# Altium PCB 175-00002 rev 4, PCB, Sinistro Clock Gen.PcbDoc (part 2 of 6)
Units mil, origin at the board's own origin, x right, y up, seen from the top; angles counter-clockwise.
Board outline 5905.51 x 4330.71 mil, 10 copper layers (Top Layer (.GTL), MidLayer1 (*.G1), +12V (*.GP1), -12V (*.GP2), A & GND (*.GP3), Chassis E (*.GP4), +28V & VCC (*.GP5), MidLayer2 (*.G2), MidLayer3 (*.G3), Bottom Layer (.GBL)), stack 64.6 mil thick; 505 components, 332 nets, 1954 pads, 918 vias.
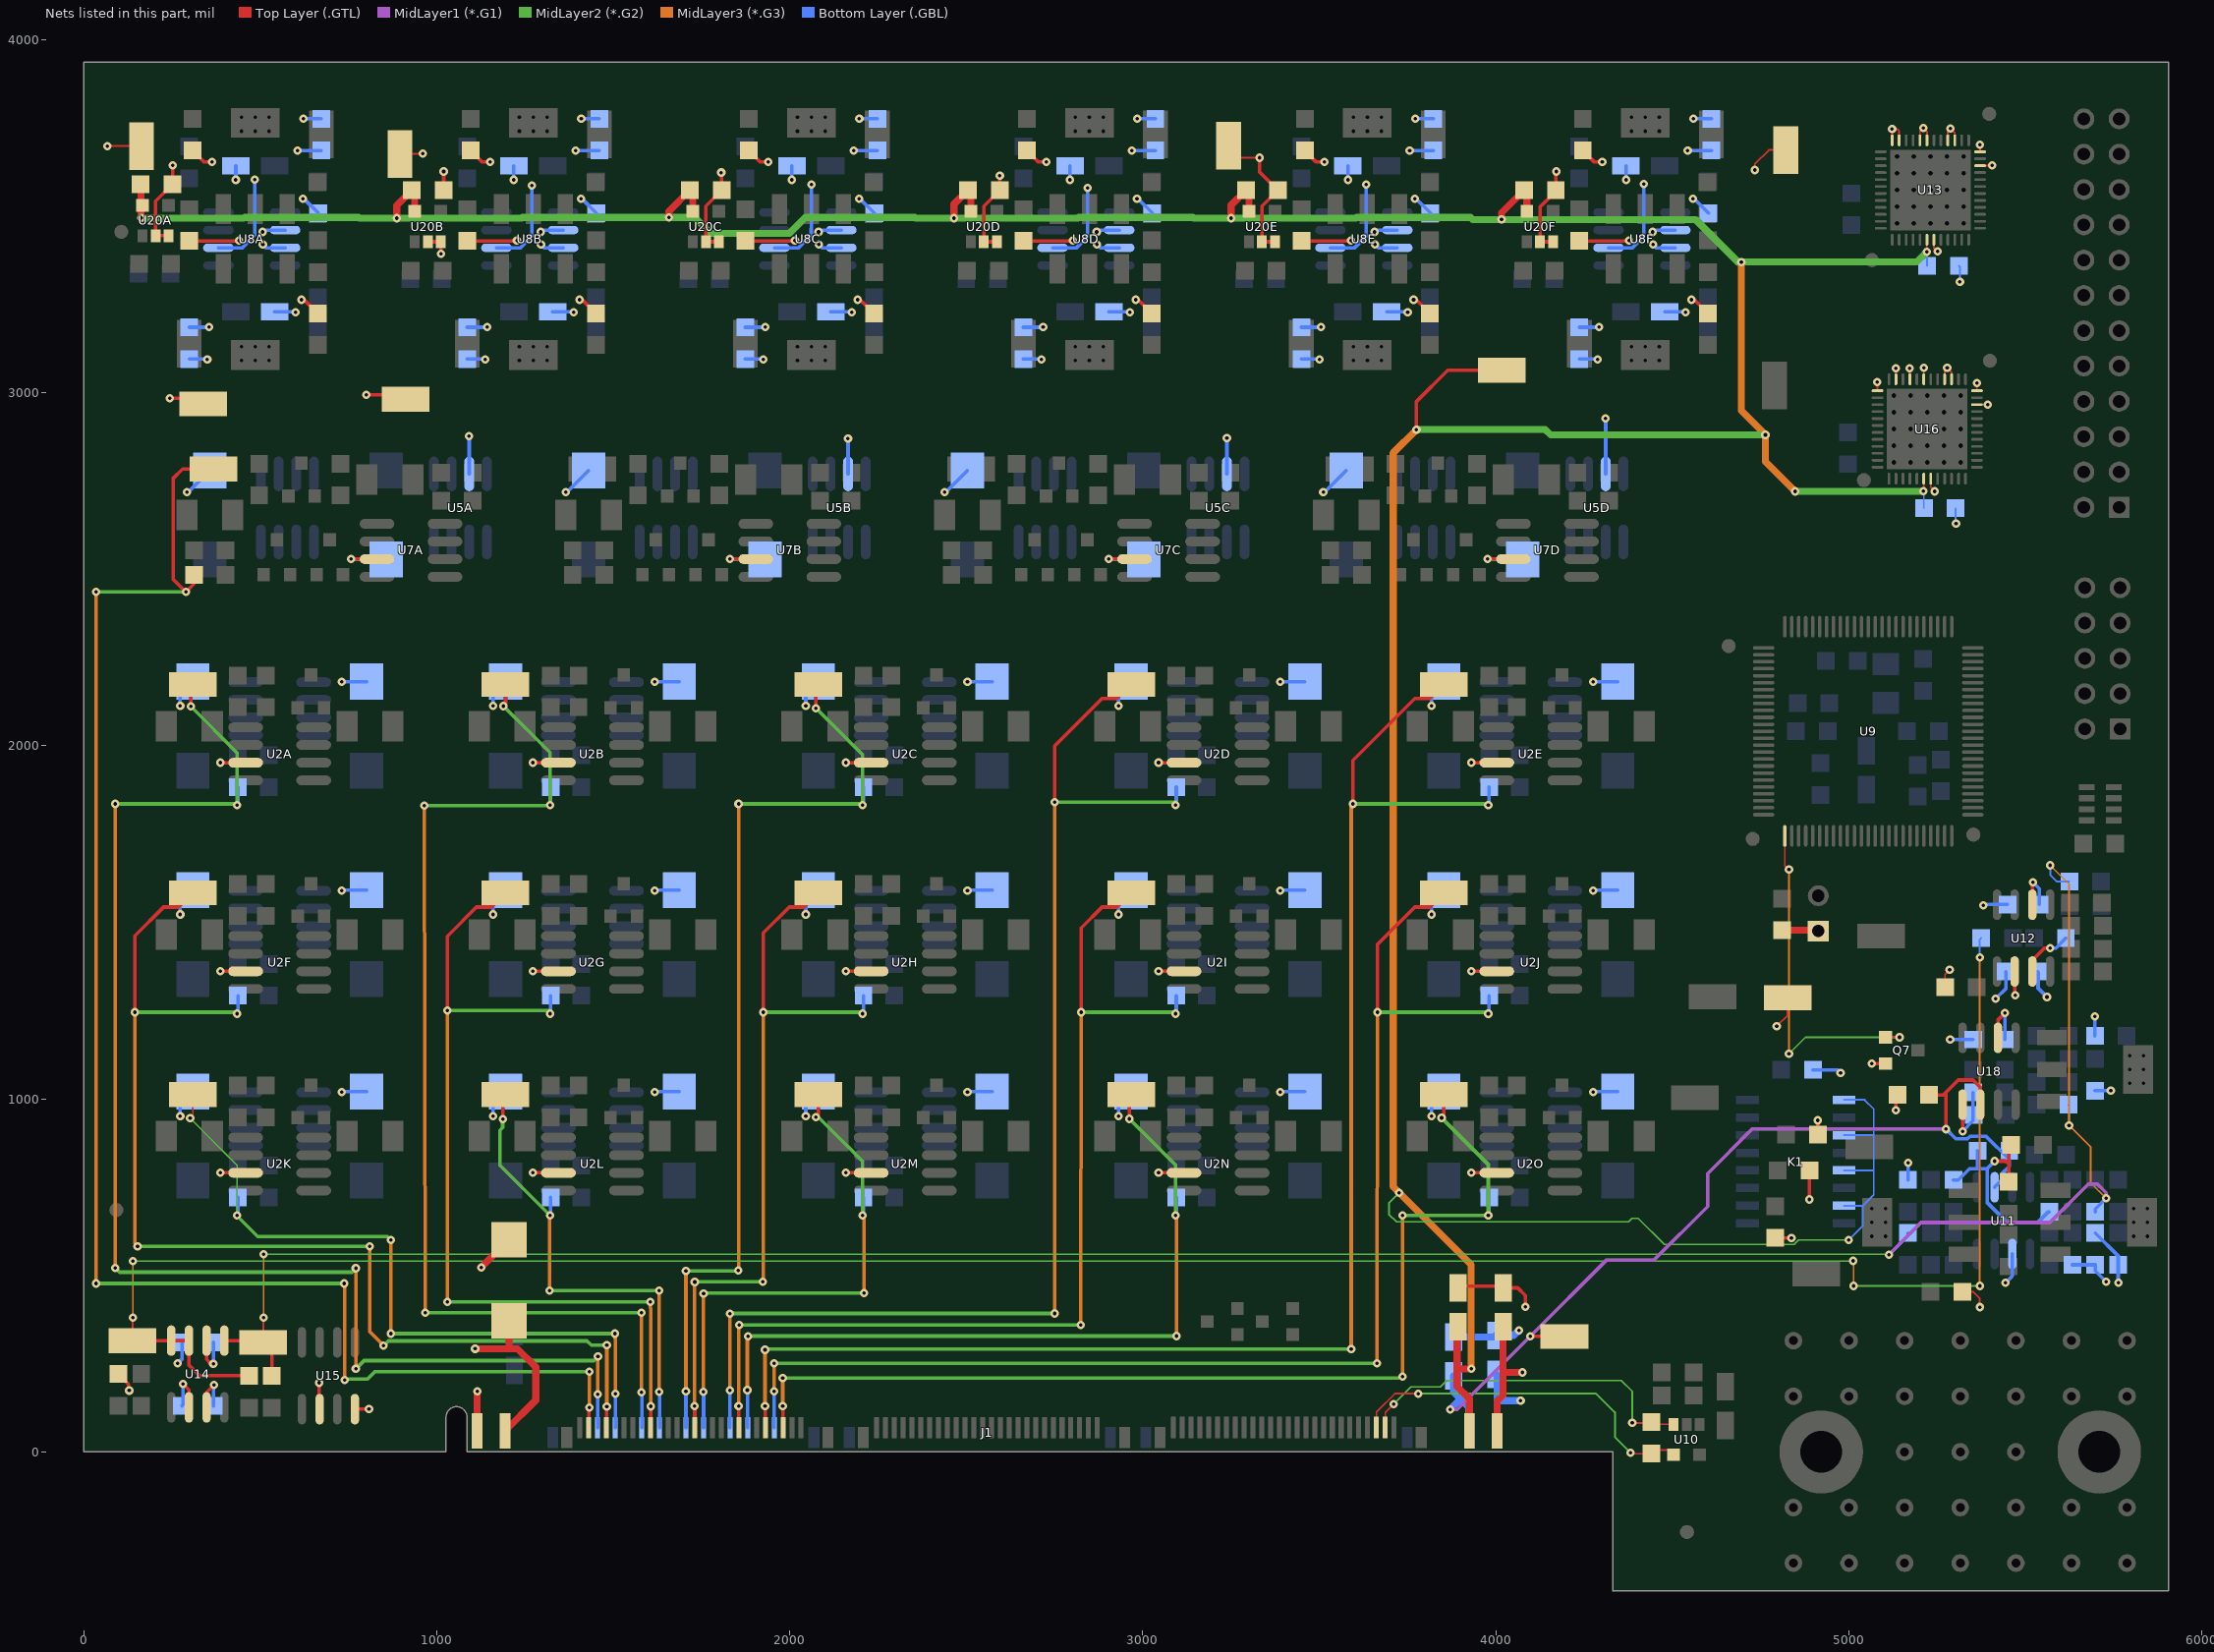
[diagram p10: the nets of this part, all layers, seen from the top]

## Footprints (in the part's own frame and the unit in brackets; to place one, negate y for a bottom-side part, rotate by r counter-clockwise, add the part's x,y. Pads: shape width x height; smd on the part's side, far side on the other; paste and mask are expansions set on the pad) (continued)
182H_N [mm] "8-Pin Small Outline Integrated Circuit 1.27 mm Pitch, IPC Medium Density"
  oval 2.2x0.6 smd: 1(-2.4,1.905) 2(-2.4,0.635) 3(-2.4,-0.635) 4(-2.4,-1.905) 5(2.4,-1.905) 6(2.4,-0.635) 7(2.4,0.635) 8(2.4,1.905)
  silkscreen extent -2.52,-2.5 0.9,2.88, body extent -1.95,-2.45 1.95,2.45, height 1.75
HDR1X2 [mm] "Connector; Header; 2 Position"
  rect 1.5x1.5 hole 0.9: 1(0,0)
  round 1.5 hole 0.9: 2(2.54,0)
  silkscreen extent -1.27,-1.27 3.81,1.27
HDR2X5 [mm] "Connector; Header; 5x2 Position"
  rect 1.5x1.5 hole 0.9: 1(0,0)
  round 1.5 hole 0.9: 2(0,2.54) 3(2.54,0) 4(2.54,2.54) 5(5.08,0) 6(5.08,2.54) 7(7.62,0) 8(7.62,2.54) 9(10.16,0) 10(10.16,2.54)
  silkscreen extent -1.27,-1.27 11.43,3.81
HDR2X12 [mm] "Connector; Header; 12x2 Position"
  rect 1.5x1.5 hole 0.9: 1(0,0)
  round 1.5 hole 0.9: 2(0,2.54) 3(2.54,0) 4(2.54,2.54) 5(5.08,0) 6(5.08,2.54) 7(7.62,0) 8(7.62,2.54) 9(10.16,0) 10(10.16,2.54) 11(12.7,0) 12(12.7,2.54) 13(15.24,0) 14(15.24,2.54) 15(17.78,0) 16(17.78,2.54) 17(20.32,0) 18(20.32,2.54) 19(22.86,0) 20(22.86,2.54) 21(25.4,0) 22(25.4,2.54) 23(27.94,0) 24(27.94,2.54)
  silkscreen extent -1.27,-1.27 29.21,3.81
QFN48_M [mm] "QFN, 48-Leads, Body 7x7mm, Pitch 0.5mm, IPC Low Density"
  round 0.66 hole 0.33 mask+0: 0(0,0)
  round 0.66 hole 0.33: 0(0,1.2) 0(0,3.6) 0(0,4.8) 0(1.2,0) 0(1.2,1.2) 0(1.2,2.4) 0(1.2,4.8) 0(2.4,0) 0(2.4,1.2) 0(2.4,2.4) 0(2.4,3.6) 0(2.4,4.8) 0(3.6,0) 0(3.6,1.2) 0(3.6,2.4) 0(3.6,3.6) 0(3.6,4.8) 0(4.8,0) 0(4.8,1.2) 0(4.8,2.4) 0(4.8,3.6) 0(4.8,4.8)
  round 0.66 hole 0.33 paste+0 mask+0: 0(0,2.4) 0(1.2,3.6)
  rect 5.8x5.8 smd: 0(2.4,2.4)
  oval 0.85x0.2 smd: 1(-1.175,5.15) 2(-1.175,4.65) 3(-1.175,4.15) 4(-1.175,3.65) 5(-1.175,3.15) 6(-1.175,2.65) 7(-1.175,2.15) 8(-1.175,1.65) 9(-1.175,1.15) 10(-1.175,0.65) 11(-1.175,0.15) 12(-1.175,-0.35) 25(5.975,-0.35) 26(5.975,0.15) 27(5.975,0.65) 28(5.975,1.15) 29(5.975,1.65) 30(5.975,2.15) 31(5.975,2.65) 32(5.975,3.15) 33(5.975,3.65) 34(5.975,4.15) 35(5.975,4.65) 36(5.975,5.15)
  oval 0.2x0.85 smd: 13(-0.35,-1.175) 14(0.15,-1.175) 15(0.65,-1.175) 16(1.15,-1.175) 17(1.65,-1.175) 18(2.15,-1.175) 19(2.65,-1.175) 20(3.15,-1.175) 21(3.65,-1.175) 22(4.15,-1.175) 23(4.65,-1.175) 24(5.15,-1.175) 37(5.15,5.975) 38(4.65,5.975) 39(4.15,5.975) 40(3.65,5.975) 41(3.15,5.975) 42(2.65,5.975) 43(2.15,5.975) 44(1.65,5.975) 45(1.15,5.975) 46(0.65,5.975) 47(0.15,5.975) 48(-0.35,5.975)
  silkscreen extent -2.27,-1.2 6,6, body extent -1.17,-1.18 5.97,5.97, height 0.9
"QMS EDGE PWR PINS" [mil] "78 pos (156 pin) + 8 pwr pins"
  rect 60x14 smd mask+0: 0(69.15,-552.45) 1(69.15,-1152.45) 3(69.15,-1127.45) 5(69.15,-1102.45) 7(69.15,-1077.45) 9(69.15,-1052.45) 11(69.15,-1027.45) 13(69.15,-1002.45) 15(69.15,-977.45) 17(69.15,-952.45) 19(69.15,-927.45) 21(69.15,-902.45) 23(69.15,-877.45) 25(69.15,-852.45) 27(69.15,-827.45) 29(69.15,-802.45) 31(69.15,-777.45) 33(69.15,-752.45) 35(69.15,-727.45) 37(69.15,-702.45) 39(69.15,-677.45) 41(69.15,-652.45) 43(69.15,-627.45) 45(69.15,-602.45) 47(69.15,-577.45) 51(69.15,-527.45) 53(68.09,-312.11) 55(68.09,-287.11) 57(68.09,-262.11) 59(68.09,-237.11) 61(68.09,-212.11) 63(68.09,-187.11) 65(68.09,-162.11) 67(68.09,-137.11) 69(68.09,-112.11) 71(68.09,-87.11) 73(68.09,-62.11) 75(68.09,-37.11) 77(68.09,-12.11) 79(68.09,12.89) 81(68.09,37.89) 83(68.09,62.89) 85(68.09,87.89) 87(68.09,112.89) 89(68.09,137.89) 91(68.09,162.89) 93(68.09,187.89) 95(68.09,212.89) 97(68.09,237.89) 99(68.09,262.89) 101(68.09,287.89) 103(68.09,312.89) 105(68.09,528.05) 107(68.09,553.05) 109(68.09,578.05) 111(68.09,603.05) 113(68.09,628.05) 115(68.09,653.05) 117(68.09,678.05) 119(68.09,703.05) 121(68.09,728.05) 123(68.09,753.05) 125(68.09,778.05) 127(68.09,803.05) 129(68.09,828.05) 131(68.09,853.05) 133(68.09,878.05) 135(68.09,903.05) 137(68.09,928.05) 139(68.09,953.05) 141(68.09,978.05) 143(68.09,1003.05) 145(68.09,1028.05) 147(68.09,1053.05) 149(68.09,1078.05) 151(68.09,1103.05) 153(68.09,1128.05) 155(68.09,1153.05)
  rect 60x14 smd far side mask+0: 2(69.15,-1152.45) 4(69.15,-1127.45) 6(69.15,-1102.45) 8(69.15,-1077.45) 10(69.15,-1052.45) 12(69.15,-1027.45) 14(69.15,-1002.45) 16(69.15,-977.45) 18(69.15,-952.45) 20(69.15,-927.45) 22(69.15,-902.45) 24(69.15,-877.45) 26(69.15,-852.45) 28(69.15,-827.45) 30(69.15,-802.45) 32(69.15,-777.45) 34(69.15,-752.45) 36(69.15,-727.45) 38(69.15,-702.45) 40(69.15,-677.45) 42(69.15,-652.45) 44(69.15,-627.45) 46(69.15,-602.45) 48(69.15,-577.45) 50(69.15,-552.45) 52(69.15,-527.45) 54(68.09,-312.11) 56(68.09,-287.11) 58(68.09,-262.11) 60(68.09,-237.11) 62(68.09,-212.11) 64(68.09,-187.11) 66(68.09,-162.11) 68(68.09,-137.11) 70(68.09,-112.11) 72(68.09,-87.11) 74(68.09,-62.11) 76(68.09,-37.11) 78(68.09,-12.11) 80(68.09,12.89) 82(68.09,37.89) 84(68.09,62.89) 86(68.09,87.89) 88(68.09,112.89) 90(68.09,137.89) 92(68.09,162.89) 94(68.09,187.89) 96(68.09,212.89) 98(68.09,237.89) 100(68.09,262.89) 102(68.09,287.89) 104(68.09,312.89) 106(68.09,528.05) 108(68.09,553.05) 110(68.09,578.05) 112(68.09,603.05) 114(68.09,628.05) 116(68.09,653.05) 118(68.09,678.05) 120(68.09,703.05) 122(68.09,728.05) 124(68.09,753.05) 126(68.09,778.05) 128(68.09,803.05) 130(68.09,828.05) 132(68.09,853.05) 134(68.09,878.05) 136(68.09,903.05) 138(68.09,928.05) 140(68.09,953.05) 142(68.09,978.05) 144(68.09,1003.05) 146(68.09,1028.05) 148(68.09,1053.05) 150(68.09,1078.05) 152(68.09,1103.05) 154(68.09,1128.05) 156(68.09,1153.05)
  rect 60x31 smd mask+0: 157(41.09,-1229.45) 159(41.09,-489.45) 161(41.09,-389.45) 163(41.09,350.55) 165(41.09,450.55) 167(41.09,1190.55)
  rect 60x31 smd far side mask+0: 158(41.09,-1189.45) 160(41.09,-449.45) 162(41.09,-349.45) 164(41.09,390.55) 166(41.09,490.55) 168(41.09,1230.55)
  rect 100x30 smd mask+0: PC01(59.65,-1444.45) PC03(59.65,-1365.55) PC05(59.15,1365.55) PC07(59.15,1444.45)
  rect 100x30 smd far side mask+0: PC02(59.65,-1444.45) PC04(59.65,-1365.55) PC06(59.15,1365.55) PC08(59.15,1444.45)
  silkscreen extent -373,-1649 217,1647
"RES ARRAY 0603 x 4" [mm]
  rect 0.44x1.15 smd: 1(0,0.1) 2(0,2.05) 3(0.8,0.1) 4(0.8,2.05) 5(1.6,0.1) 6(1.6,2.05) 7(2.4,0.1) 8(2.4,2.05)
  silkscreen extent -0.6,-0.6 3,1.8
S8_N [mm] "SOIC, 8-Leads, Body 4.9x3.9mm, Pitch 1.27mm, IPC Medium Density"
  oval 2.2x0.6 smd: 1(-2.4,1.905) 2(-2.4,0.635) 3(-2.4,-0.635) 4(-2.4,-1.905) 5(2.4,-1.905) 6(2.4,-0.635) 7(2.4,0.635) 8(2.4,1.905)
  silkscreen extent -2.53,-2.5 0.9,2.88, body extent -1.95,-2.45 1.95,2.45, height 1.76
SMD_0805 [mil]
  rect 50x50 smd: 1(-45,0) 2(45,0)
  silkscreen extent -1,-1 1,1
SMD_1206 [mil]
  rect 63x75 smd: 1(-55,0) 2(55,0)
SMD_1210_INDUCT [mil]
  rect 60x86 smd: 1(-65,0) 2(65,0)
  silkscreen extent -73,-62 73,62
SMD_CAP_3216 [mil]
  rect 78x48 smd: 1(55,0) 2(-55,0)
  silkscreen extent -108,-65 134,38
SMD_CAP_6032 [mil]
  rect 100x100 smd: NEG(-115,0) POS(115,0)
  silkscreen extent -179,-110 195,64
SMD_CAP_7343 [mil]
  rect 102x94 smd: NEG(-126,0) POS(126,0)
  silkscreen extent -145,-80 220,80
SMD_SOT23_3 [mil]
  rect 36x36 smd: 1(-37,-43) 2(37,-43) 3(0,43)
  silkscreen extent -57,-25 57,25
SMD_SOT23_5 [mil]
  rect 28x36 smd: 1(37,43) 2(0,43) 3(-37,43)
  rect 36x36 smd: 4(-37,-43) 5(37,-43)
  silkscreen extent -57,-25 57,85
"SMD_TEST POINT" [mil] "Keystone 5015"
  rect 135x70 smd: 1(0,0)
SO-16 [mm] "Small Outline; 16 Leads; Body Width 5.6 mm; Pitch 1.27 mm"
  rect 0.6x1.65 smd: 1(-4.445,-3.475) 2(-3.175,-3.475) 3(-1.905,-3.475) 4(-0.635,-3.475) 5(0.635,-3.475) 6(1.905,-3.475) 7(3.175,-3.475) 8(4.445,-3.475) 9(4.445,3.475) 10(3.175,3.475) 11(1.905,3.475) 12(0.635,3.475) 13(-0.635,3.475) 14(-1.905,3.475) 15(-3.175,3.475) 16(-4.445,3.475)
  silkscreen extent -5.65,-3.6 5.65,2.25
SOT23A [mm] "SOT-23; 3 Leads; Body 3.0 x 2.5 mm, inc. leads (LxW max)"
  rect 0.9x0.95 smd: 1(-0.95,-1.175) 2(0.95,-1.175) 3(0,1.175)
  silkscreen extent -2.07,-1.3 1.3,1.18
"SOT223 w/PowerPAD" [mm] "SOT-223/SC-73; 4 Leads; Body 6.7 x 7.3 mm, inc. leads (LxW max)"
  rect 1.1x2.15 smd: 1(-2.3,-3.1) 2(0,-3.1) 3(2.3,-3.1)
  round 0.508 hole 0.254: 4(-1,2.5) 4(-1,3.5) 4(0,2.5) 4(0,3.5) 4(1,2.5) 4(1,3.5)
  rect 3.5x2.15 smd: 4(0,3.1)
  silkscreen extent -3.35,-4.85 3.35,1.62
SOT-23 [mm] "SOT-23; 3 Leads; Body 3.0 x 2.6 mm, inc. leads (LxW max)"
  rect 0.9x0.95 smd: 1(-0.95,-1.25) 2(0.95,-1.25) 3(0,1.25)
  silkscreen extent -2.07,-1.37 1.3,1.25
"TARGET MECHANICAL 5" [mil]
TQFP100_L [mm] "Thin QFP, 100-Leads, Body 14x14mm, Pitch 0.5mm, IPC High Density"
  oval 1.55x0.25 smd: 1(-7.525,6) 2(-7.525,5.5) 3(-7.525,5) 4(-7.525,4.5) 5(-7.525,4) 6(-7.525,3.5) 7(-7.525,3) 8(-7.525,2.5) 9(-7.525,2) 10(-7.525,1.5) 11(-7.525,1) 12(-7.525,0.5) 13(-7.525,0) 14(-7.525,-0.5) 15(-7.525,-1) 16(-7.525,-1.5) 17(-7.525,-2) 18(-7.525,-2.5) 19(-7.525,-3) 20(-7.525,-3.5) 21(-7.525,-4) 22(-7.525,-4.5) 23(-7.525,-5) 24(-7.525,-5.5) 25(-7.525,-6) 51(7.525,-6) 52(7.525,-5.5) 53(7.525,-5) 54(7.525,-4.5) 55(7.525,-4) 56(7.525,-3.5) 57(7.525,-3) 58(7.525,-2.5) 59(7.525,-2) 60(7.525,-1.5) 61(7.525,-1) 62(7.525,-0.5) 63(7.525,0) 64(7.525,0.5) 65(7.525,1) 66(7.525,1.5) 67(7.525,2) 68(7.525,2.5) 69(7.525,3) 70(7.525,3.5) 71(7.525,4) 72(7.525,4.5) 73(7.525,5) 74(7.525,5.5) 75(7.525,6)
  oval 0.25x1.55 smd: 26(-6,-7.525) 27(-5.5,-7.525) 28(-5,-7.525) 29(-4.5,-7.525) 30(-4,-7.525) 31(-3.5,-7.525) 32(-3,-7.525) 33(-2.5,-7.525) 34(-2,-7.525) 35(-1.5,-7.525) 36(-1,-7.525) 37(-0.5,-7.525) 38(0,-7.525) 39(0.5,-7.525) 40(1,-7.525) 41(1.5,-7.525) 42(2,-7.525) 43(2.5,-7.525) 44(3,-7.525) 45(3.5,-7.525) 46(4,-7.525) 47(4.5,-7.525) 48(5,-7.525) 49(5.5,-7.525) 50(6,-7.525) 76(6,7.525) 77(5.5,7.525) 78(5,7.525) 79(4.5,7.525) 80(4,7.525) 81(3.5,7.525) 82(3,7.525) 83(2.5,7.525) 84(2,7.525) 85(1.5,7.525) 86(1,7.525) 87(0.5,7.525) 88(0,7.525) 89(-0.5,7.525) 90(-1,7.525) 91(-1.5,7.525) 92(-2,7.525) 93(-2.5,7.525) 94(-3,7.525) 95(-3.5,7.525) 96(-4,7.525) 97(-4.5,7.525) 98(-5,7.525) 99(-5.5,7.525) 100(-6,7.525)
  silkscreen extent -7.65,-6.35 6.35,6.8, body extent -7,-7 7,7, height 1.2

## Part data
C1A C1B C1C C1D C1E C1F C1G C1H C1I C1J C1K C1L C1M C1N C1O C3A C3B C3C C3D C3E C3F C3G C3H C3I C3J C3K C3L C3M C3N C3O C5A C5B C5C C5D C8A C8B C8C C8D C59: library part "Cap Tant 35V", "outline 6.0mm x 3.2mm"
C2A C2B C2C C2D C2E C2F C2G C2H C2I C2J C2K C2L C2M C2N C2O C4A C4B C4C C4D C4E C4F C4G C4H C4I C4J C4K C4L C4M C4N C4O C6A C6B C6C C6D C9A C9B C9C C9D C9E C9F C10A C10B C10C C10D C10E C10F C11A C11B C11C C11D C11E C11F C12 C15A C15B C15C C15D C15E C15F C16 C17 C18 C19 C20 C21 C22 C23 C24 C25 C26 C27 C28 C29 C30 C31 C33 C34 C35 C36 C37A C37B C37C C37D C38 C39 C40 C41 C42 C43 C44A C44B C44C C44D C44E C44F C45 C46 C47 C48 C49 C56: "Capacitor"
C7 C13A C13B C13C C13D C13E C13F C14A C14B C14C C14D C14E C14F C32 C53 C54 C55 C57 C58: library part "Cap Tant 15V", "outline 3.2mm x 1.6mm"
D1A D1B D1C D1D D2A D2B D2C D2D: "Silicon Switching Diode for High-Speed Switching"
J1: "SAMTEC QMSS EDGE W/PWR PINS"
K1: library part "Relay, Solid State, 4 Form A", "Panasonic AQS221"
L5: library part INDUCTOR1
P1: "Header, 5-Pin, Dual row"
P2: "Header, 2-Pin"
P3: "Header, 12-Pin, Dual row"
Q1A Q1B Q1C Q1D Q1E Q1F Q3 Q4 Q5: "NPN 40V 3A 2W"
Q2A Q2B Q2C Q2D Q2E Q2F: "PNP 40V 3A 2W"
Q6: "P-MOSFET LOGIC LEVEL"
Q7: "N-Chan MOSFET"
R1A R1B R1C R1D R1E R1F R1G R1H R1I R1J R1K R1L R1M R1N R1O R2A R2B R2C R2D R2E R2F R2G R2H R2I R2J R2K R2L R2M R2N R2O R3A R3B R3C R3D R4A R4B R4C R4D R5A R5B R5C R5D R6A R6B R6C R6D R7A R7B R7C R7D R7E R7F R8A R8B R8C R8D R8E R8F R9A R9B R9C R9D R9E R9F R10A R10B R10C R10D R10E R10F R11 R12A R12B R12C R12D R12E R12F R13A R13B R13C R13D R13E R13F R14A R14B R14C R14D R14E R14F R15 R16 R17A R17B R17C R17D R17E R17F R18 R19 R20A R20B R20C R20D R20E R20F R21 R22 R23A R23B R23C R23D R23E R23F R24 R25 R27 R28 R29 R30 R31 R32 R33 R34 R35 R37 R39 R40 R41 R42 R43 R44 R45 R46 R47: "Resistor"
R26 R36 R38 R48 R49 R50 R51 R52: library part "Res SMD", "Resistor 0805"
RN1: "Resistor Array 4 Isolated"
TP1A TP1B TP1C TP1D TP1E TP1F TP2A TP2B TP2C TP2D TP2E TP2F TP3A TP3B TP3C TP3D TP3E TP3F TP3G TP3H TP3I TP3J TP3K TP3L TP3M TP3N TP3O TP4A TP4B TP4C TP4D TP5 TP6 TP7 TP8 TP9 TP10 TP11 TP12 TP13 TP14 TP15 TP16 TP17 TP18 TP19 TP20 TP21: "SMD loop test point"
U1A U1B U1C U1D U1E U1F U1G U1H U1I U1J U1K U1L U1M U1N U1O U4A U4B U4C U4D: "3-Terminal Positive Regulator"
U2A U2B U2C U2D U2E U2F U2G U2H U2I U2J U2K U2L U2M U2N U2O U5A U5B U5C U5D U7A U7B U7C U7D: "CMOS Optocoupler"
U3A U3B U3C U3D U3E U3F U3G U3H U3I U3J U3K U3L U3M U3N U3O U6A U6B U6C U6D: "MOSFET driver non-inverting"
U8A U8B U8C U8D U8E U8F U11 U12 U14 U18: "Dual Low Noise, High-Speed Precision Operational Amplifier"
U9: "MAX II 3.3/2.5V CPLD, 80 IOs, 240 Logic Elements, 100-Pin Plastic TQFP, Commercial Temperature, Speed Grade 3"
U13 U16: "12-Bit MultChan ADC/DAC"
U15: "+5V Precision Voltage Reference"
U19: "Silicon Serial Number"
U20A U20B U20C U20D U20E U20F: "CMOS, Rail-to-Rail Opamp"

## Free pads (board coordinates)
  round 50 hole 25: 0(4842.52,-314.96) 0(4842.52,-157.48) 0(4842.52,157.48) 0(4842.52,314.96) 0(5000,-314.96) 0(5000,-157.48) 0(5000,157.48) 0(5000,314.96) 1(5157.48,-314.96) 1(5157.48,-157.48) 1(5157.48,0) 1(5157.48,157.48) 1(5157.48,314.96) 2(5314.96,-314.96) 2(5314.96,-157.48) 2(5314.96,0) 2(5314.96,157.48) 2(5314.96,314.96) 3(5472.44,-314.96) 3(5472.44,-157.48) 3(5472.44,0) 3(5472.44,157.48) 3(5472.44,314.96) 4(5629.92,-314.96) 4(5629.92,-157.48) 4(5629.92,157.48) 4(5629.92,314.96) 5(5787.4,-314.96) 5(5787.4,-157.48) 5(5787.4,157.48) 5(5787.4,314.96)
  round 236.22 hole 118.11: 0(4921.26,0) 1(5708.66,0)
  round 40 smd mask+40: ""(93,685) ""(107,3455) ""(4541,-227)
  round 40 smd mask+20: ""(4659,2282) ""(4727,1736) ""(5042,2752) ""(5065,3375) ""(5352,1748) ""(5397,3789) ""(5399,3090)

## Via types
v1: diameter 24, hole 10, Top Layer (.GTL) to Bottom Layer (.GBL), 918 vias

## Nets (pads, with @x,y where several pads share a name; then routed paths per layer and width w, separated by ;. In a path a pad name is that pad's centre, name@x,y a point inside that pad or via, vN(x,y) a via of type N, cw(c..) or ccw(c..) an arc to the next point about the centre after c; other vN are vias at no path point)
+5ANA: C33.2 C35.2 C44A.1 C44B.1 C44C.1 C44D.1 C44E.1 C44F.1 C58.1 J1.PC03 K1.1 K1.3 K1.5 K1.7 TP17.1 U13.18 U16.18 U20A.5 U20B.5 U20C.5 U20D.5 U20E.5 U20F.5 | length 13936.7
  Top Layer (.GTL) w5: v1(5211,2720.26) 5211.65,2720.91 U16.18@5211.65,2756 ; v1(5220,3398) 5220,3432.09 U13.18@5220.64,3432.74
  Top Layer (.GTL) w10: v1(3775,2895) 3775,2974.49 3863.51,3063 TP17.1@4017,3063
  Top Layer (.GTL) w20: C44A.1@162,3590 163,3589 v1(163,3494) ; v1(887,3493.69) 887,3530 C44B.1@930,3573 938,3565 U20B.5@938,3513 ; v1(1658,3496) 1658,3513.6 C44C.1@1717.4,3573 1725.4,3565 U20C.5@1725.4,3513 ; v1(2465,3493.69) 2465,3533.2 C44D.1@2504.8,3573 2512.8,3565 U20D.5@2512.8,3513 ; v1(3250,3493.69) 3250,3530.8 C44E.1@3292.2,3573 3300.2,3565 U20E.5@3300.2,3513 ; C58.1@3890,354.37 3890,235 ; J1.PC03@3924.6,59.65 3924.6,150.4 3890,185 3890,235 ; v1(3930,235) 3890,235 ; v1(4016,3490) 4016,3509.39 C44F.1@4079.61,3573 4087.61,3565 U20F.5@4087.61,3513
  MidLayer2 (*.G2) w5: v1(3726,734) 3697,705 3697,673 3718.5,651.5 4375.34,651.5 4385.34,661.5 4402.66,661.5 4476.66,587.5 4844.66,587.5 4857.16,600 v1(4999,600)
  MidLayer2 (*.G2) w20: v1(163,3494) 163.31,3493.69 453.76,3493.69 456.08,3496 778.77,3496 781.08,3493.69 v1(887,3493.69) 1241.16,3493.69 1243.48,3496 v1(1658,3496) 1731,3496 1776.26,3450.74 1998.69,3450.74 2043.95,3496 2353.57,3496 2355.89,3493.69 v1(2465,3493.69) 2815.97,3493.69 2818.07,3495.78 3141.17,3495.78 3143.26,3493.69 v1(3250,3493.69) 3603.37,3493.69 3605.47,3495.78 3928.57,3495.78 3934.35,3490 v1(4016,3490) 4564.88,3490 4685.88,3369 v1(4695,3369) 4696,3370 5192,3370 v1(5220,3398) ; v1(3775,2895) 4140,2895 4155,2880 v1(4763,2880) v1@4763,2881 ; v1(4847,2720) 5210.74,2720 v1(5211,2720.26)
  MidLayer3 (*.G3) w20: v1(3775,2895) 3709,2829 3709,751 v1(3726,734) 3930,530 v1(3930,235) ; v1(4695,3369) 4695,2949 4763,2881 v1(4763,2880) 4763,2804 v1(4847,2720)
  Bottom Layer (.GBL) w5: K1.7@4985.81,697 5039,697 ; K1.5@4985.81,797 5069,797 5070,798 ; K1.3@4985.81,897 5070,897 ; K1.1@4985.81,997 5044,997 5070,971 5070,897 ; v1(4999,600) 5039,640 5039,697 ; v1(5211,2720.26) 5212,2719.26 C35.2@5212,2672.26 ; v1(5220,3398) 5221,3397 C33.2@5221,3359 ; 5039,697 5070,728 5070,798 ; 5070,798 5070,897
+5VREF: R24.1 R46.1 TP9.1 U14.7 U14.8 | length 6939.8
  Top Layer (.GTL) w5: TP9.1@138.96,315 138.96,378.96 v1(140,380)
  Top Layer (.GTL) w10: TP9.1@138.96,315 U14.8@248.47,315 U14.7@298.47,315 298.47,245.74 328.69,215.51 R46.1@468.47,215.51
  MidLayer2 (*.G2) w5: v1(140,540) 1117.84,540 1118.34,540.5 1133.66,540.5 1134.16,540 5005,540 v1@5012.5,547.5 ; v1(5013,470) v1(5370,470)
  MidLayer3 (*.G3) w5: v1(140,380) v1(140,540) ; v1(5012,541) 5012,546 5013,547 v1(5013,470) ; v1(5370,470) v1(5370,1400)
  Bottom Layer (.GBL) w5: v1(5370,1400) 5370,1451 R24.1@5374,1455
+12V: C9A.1 C9B.1 C9C.1 C9D.1 C9E.1 C9F.1 C25.1 C41.1 C57.1 J1.PC01 R12A.2 R12B.2 R12C.2 R12D.2 R12E.2 R12F.2 TP16.1 U8A.6 U8B.6 U8C.6 U8D.6 U8E.6 U8F.6 U12.6 U14.6 U15.2 | length 3098.9
  Top Layer (.GTL) w10: v1(244,2984) 323,2984 TP16.1@339,2968 ; R12A.2@309.13,3685.32 341.89,3652.56 363.27,3652.56 v1(364.25,3653.54) ; U14.6@348.47,315 348.47,261.74 360.46,249.74 v1(367.46,249.74) ; v1(667.46,195.74) 667.46,122.02 U15.2@668.46,121.02 ; R12B.2@1096.54,3685.32 1129.29,3652.56 1150.67,3652.56 v1(1151.65,3653.54) ; R12C.2@1883.94,3685.32 1916.69,3652.56 1938.07,3652.56 v1(1939.06,3653.54) ; R12D.2@2671.34,3685.32 2704.09,3652.56 2725.47,3652.56 v1(2726.46,3653.54) ; R12E.2@3458.74,3685.32 3491.49,3652.56 3512.87,3652.56 v1(3513.86,3653.54) ; R12F.2@4246.14,3685.32 4278.9,3652.56 4300.27,3652.56 v1(4301.26,3653.54) ; U12.6@5519,1549.49 5519,1611.77 v1(5520.46,1613.23)
  Top Layer (.GTL) w20: J1.PC01@4003.5,59.65 4003.5,143.5 4020,160 4020,225 ; C57.1@4020,354.37 4020,225 ; v1(4075,225) 4020,225
  Bottom Layer (.GBL) w10: v1(367.46,249.74) 368.46,250.74 C41.1@368.46,310.51 ; U8A.6@381.97,3410.04 382.89,3409.12 433.48,3409.12 448.74,3409.12 485,3445.38 v1(485,3603) ; v1(622.21,3775.53) 622.4,3775.32 C9A.1@673.31,3775.32 ; U8B.6@1169.37,3410.04 1170.29,3409.12 1220.88,3409.12 1236.14,3409.12 1270,3442.98 v1(1270,3586) ; v1(1409.61,3775.53) 1409.81,3775.32 C9B.1@1460.71,3775.32 ; U8C.6@1956.77,3410.04 1957.69,3409.12 2008.28,3409.12 2023.54,3409.12 2060.77,3446.35 2060.77,3463.42 2061,3463.65 v1(2061,3589) ; v1(2197.02,3775.53) 2197.21,3775.32 C9C.1@2248.11,3775.32 ; U8D.6@2744.17,3410.04 2745.09,3409.12 2795.69,3409.12 2810.94,3409.12 2843,3441.18 v1(2843,3579) ; v1(2984.42,3775.53) 2984.61,3775.32 C9D.1@3035.51,3775.32 ; U8E.6@3531.57,3410.04 3532.49,3409.12 3583.09,3409.12 3598.34,3409.12 3633,3443.77 v1(3633,3589) ; v1(3771.82,3775.53) 3772.01,3775.32 C9E.1@3822.91,3775.32 ; U8F.6@4318.97,3410.04 4319.9,3409.12 4370.49,3409.12 4385.74,3409.12 4419,3442.37 v1(4419,3590) ; v1(4559.22,3775.53) 4559.41,3775.32 C9F.1@4610.31,3775.32 ; v1(5520.46,1613.23) 5539,1594.68 C25.1@5539,1550
+28V: C22.1 C40.1 C59.POS J1.PC05 R30.2 R33.2 R39.2 TP18.1 U11.6 U18.6 | length 1100.8
  Top Layer (.GTL) w5: v1(4795,1205) 4826,1236 TP18.1@4826,1286
  Top Layer (.GTL) w10: U18.6@5421.46,1172.32 5421.46,1222.84 v1(5441.46,1242.84)
  Top Layer (.GTL) w20: v1(1109,292) 1203,292 ; J1.PC05@1193.5,59.15 1281,146.64 1281,240 1229,292 1203,292 ; C59.POS@1205,371.37 1205,294 1203,292
  Bottom Layer (.GBL) w10: R30.2@5167.22,769.92 5167.22,818.04 v1(5167.72,818.54) ; C40.1@5441.46,1167.84 v1(5441.46,1242.84) ; v1(5442.72,478.54) 5462.22,498.04 U11.6@5462.22,560.43 ; R39.2@5696.46,1177.84 v1(5696.46,1232.84) ; C22.1@5697.21,619.92 5762.21,554.92 R33.2@5762.21,529.92 5762.21,479.05 v1(5762.72,478.54)
+CLK_100: J1.3 R11.1 U10.3 | length 1010.7
  Top Layer (.GTL) w5: J1.3@3686.5,69.15 3686.5,111.5 v1(3710,135) ; v1(4386,82) R11.1@4440.56,82 ; R11.1@4440,95 4457,78 U10.3@4503,78
  MidLayer2 (*.G2) w5: v1@3713.5,138.5 v1(3710,135) 3759,184 3843,184 3861,202 4355,202 4386,171 v1(4386,82)
-5ANA: C46.2 C47.1 C53.2 J1.PC04 TP20.1 U11.2 U18.2 | length 2742.6
  Top Layer (.GTL) w10: v1(4097,327) TP20.1@4194,327 ; C47.1@5227,1011 5267,1011 5275,1019 ; v1(5275,914) 5275,1019 ; U18.2@5371.46,983.35 5371.46,1032.54 5351,1053 5309,1053 5275,1019
  MidLayer1 (*.G1) w10: v1(3870,120) 3890,120 v1(4097,327) 4313.48,543.49 4448.18,543.49 4599.18,694.49 4599.18,788 4725.18,914 v1(5275,914)
  Bottom Layer (.GBL) w10: v1(5275,914) 5302.16,886.84 5335.11,886.84 5342.27,894 5388,894 5454,828 5454,808.78 5434,788.78 5434,771.19 U11.2@5412.22,749.41
  Bottom Layer (.GBL) w20: v1(3870,120) 3899.8,149.8 ; C53.2@3880,215 3880,169.61 3899.8,149.8 ; J1.PC04@3924.6,59.65 3924.6,125 3899.8,149.8
-5VREF: R16.1 R19.1 R38.2 R40.1 R45.2 TP10.1 U14.5 | length 7086.2
  Top Layer (.GTL) w5: TP10.1@508.96,310 508.96,378.96 v1(510,380)
  Top Layer (.GTL) w10: U14.5@398.47,315 503.97,315 TP10.1@508.96,310 533.46,285.5 R45.2@533.46,215.51
  MidLayer1 (*.G1) w10: v1(5112.72,558.54) 5203.72,649.54 5568.72,649.54 5677.72,758.54 5702.72,758.54 5727.72,733.54 v1(5727.72,718.54)
  MidLayer2 (*.G2) w5: v1(510,560) 5111.26,560 v1(5112.72,558.54)
  MidLayer3 (*.G3) w5: v1(510,380) v1(510,560) ; v1(5570,1661) 5623,1608 v1(5623,924) 5624.16,924 5684,864.16 5684,762.26 v1(5727.72,718.54)
  Bottom Layer (.GBL) w5: v1(5570,1661) 5570,1634 5589,1615 R38.2@5624,1615 ; R40.1@5621.46,982.84 5623,981.29 v1(5623,924)
  Bottom Layer (.GBL) w10: v1(5112.72,558.54) 5167.21,613.04 R16.1@5167.21,619.92 ; R19.1@5697.22,679.92 5697.22,688.04 v1(5727.72,718.54)
-12V: C11A.1 C11B.1 C11C.1 C11D.1 C11E.1 C11F.1 C27.1 C43.1 C54.2 J1.PC02 R20A.1 R20B.1 R20C.1 R20D.1 R20E.1 R20F.1 TP21.1 U8A.2 U8B.2 U8C.2 U8D.2 U8E.2 U8F.2 U12.2 U14.2 | length 1743.6
  Top Layer (.GTL) w10: v1(282,192) 298.47,175.53 U14.2@298.47,126.02 ; v1(617.2,3262.8) 624.8,3262.8 R20A.1@663.46,3224.13 ; v1(801,2993) 900,2993 TP21.1@912,2981 ; v1(1404.61,3262.8) 1412.2,3262.8 R20B.1@1450.87,3224.13 ; v1(2192.01,3262.8) 2199.61,3262.8 R20C.1@2238.27,3224.13 ; v1(2979.41,3262.8) 2987.01,3262.8 R20D.1@3025.67,3224.13 ; v1(3766.81,3262.8) 3774.41,3262.8 R20E.1@3813.07,3224.13 ; v1(4554.21,3262.8) 4561.81,3262.8 R20F.1@4600.47,3224.13 ; U12.2@5469,1360.51 5469,1291.77 v1(5470.46,1293.23)
  Bottom Layer (.GBL) w10: C43.1@278.46,130.51 282,134.04 v1(282,192) ; C11A.1@299.29,3184.76 355.12,3184.76 v1(355.39,3185.04) ; v1(506.97,3454.72) 512.28,3460.04 U8A.2@570.94,3460.04 ; C11B.1@1086.69,3184.76 1142.52,3184.76 v1(1142.79,3185.04) ; v1(1294.37,3454.72) 1299.68,3460.04 U8B.2@1358.35,3460.04 ; C11C.1@1874.09,3184.76 1929.92,3184.76 v1(1930.2,3185.04) ; v1(2081.77,3454.72) 2087.09,3460.04 U8C.2@2145.75,3460.04 ; C11D.1@2661.5,3184.76 2717.32,3184.76 v1(2717.6,3185.04) ; v1(2869.17,3454.72) 2874.49,3460.04 U8D.2@2933.15,3460.04 ; C11E.1@3448.9,3184.76 3504.72,3184.76 v1(3505,3185.04) ; v1(3656.57,3454.72) 3661.89,3460.04 U8E.2@3720.55,3460.04 ; C11F.1@4236.3,3184.76 4292.13,3184.76 v1(4292.4,3185.04) ; v1(4443.98,3454.72) 4449.29,3460.04 U8F.2@4507.95,3460.04 ; C27.1@5534,1360 5535.46,1358.54 5535.46,1313.23 v1(5560.46,1288.23)
  Bottom Layer (.GBL) w20: C54.2@4000,220 4003.5,216.5 4003.5,140 ; J1.PC02@4003.5,59.65 4003.5,140 ; v1(4070,145) 4008.5,145 4003.5,140
-CLK_100: J1.5 R11.2 U10.4 | length 1024.5
  Top Layer (.GTL) w5: J1.5@3661.5,69.15 3661.5,112.67 3713.84,165 v1(3780,165) ; v1(4381,-2) 4384,-5 R11.2@4440,-5 ; R11.2@4440,5 4490,5 U10.4@4503,-8
  MidLayer2 (*.G2) w5: v1(3780,165) 4284,165 4337,112 4337,42 v1(4381,-2) v1@4381,-1
A: C1A.NEG C1B.NEG C1C.NEG C1D.NEG C1E.NEG C1F.NEG C1G.NEG C1H.NEG C1I.NEG C1J.NEG C1K.NEG C1L.NEG C1M.NEG C1N.NEG C1O.NEG C3A.POS C3B.POS C3C.POS C3D.POS C3E.POS C3F.POS C3G.POS C3H.POS C3I.POS C3J.POS C3K.POS C3L.POS C3M.POS C3N.POS C3O.POS C5A.NEG C5B.NEG C5C.NEG C5D.NEG C8A.POS C8B.POS C8C.POS C8D.POS C9A.2 C9B.2 C9C.2 C9D.2 C9E.2 C9F.2 C11A.2 C11B.2 C11C.2 C11D.2 C11E.2 C11F.2 C13A.2 C13B.2 C13C.2 C13D.2 C13E.2 C13F.2 C14A.1 C14B.1 C14C.1 C14D.1 C14E.1 C14F.1 C22.2 C25.2 C27.2 C33.1 C35.1 C38.1 C40.2 C41.2 C42.1 C43.2 C44A.2 C44B.2 C44C.2 C44D.2 C44E.2 C44F.2 C45.1 C46.1 C47.2 C48.1 C49.1 C53.1 C54.1 C56.1 C57.2 C58.2 C59.NEG J1.PC07 P2.1 Q7.2 R8A.1 R8B.1 R8C.1 R8D.1 R8E.1 R8F.1 R14A.1 R14B.1 R14C.1 R14D.1 R14E.1 R14F.1 R25.1 R27.1 R29.1 R32.1 R35.2 R41.1 R44.2 R49.1 R50.1 R51.1 R52.1 TP11.1 TP12.1 TP13.1 TP14.1 U2A.3 U2B.3 U2C.3 U2D.3 U2E.3 U2F.3 U2G.3 U2H.3 U2I.3 U2J.3 U2K.3 U2L.3 U2M.3 U2N.3 U2O.3 U5A.3 U5B.3 U5C.3 U5D.3 U7A.3 U7B.3 U7C.3 U7D.3 U8A.3 U8B.3 U8C.3 U8D.3 U8E.3 U8F.3 U12.3 U13.19 U13.34 U13.36 U13.39 U13.40 U13.43 U13.44 U13.47 U13.48 U14.3 U15.4 U16.1 U16.19 U16.34 U16.36 U16.39 U16.40 U16.43 U16.45 U16.47 U18.1 U20A.2 U20A.3 U20B.2 U20B.3 U20C.2 U20C.3 U20D.2 U20D.3 U20E.2 U20E.3 U20F.2 U20F.3 | length 13386.3
  Top Layer (.GTL) w5: v1(67,3698) TP14.1@164,3698 ; TP11.1@896,3676 960,3676 v1(961,3677) ; TP12.1@3257,3665 v1(3331,3665) ; v1(4733,3630) 4733,3647 4773,3687 TP13.1@4821,3687 ; v1(5080,3030) 5080.74,3029.26 U16.1@5080.74,3005.02 ; U13.48@5122.22,3714.24 5122.22,3745.78 v1(5122,3746) 5137,3746 5141.9,3741.09 U13.47@5141.9,3714.24 ; U16.47@5132.91,3037.5 5132.91,3068.91 v1(5133,3069) ; v1(5172,3069) 5172.28,3068.72 U16.45@5172.28,3037.5 ; U13.44@5200.96,3714.24 5200.96,3738.96 v1(5211,3749) 5220.64,3739.36 U13.43@5220.64,3714.24 ; U16.43@5211.65,3037.5 5211.65,3069.65 v1(5212,3070) ; U16.19@5231.33,2756 5231.33,2731.67 v1(5243,2720) ; U13.19@5240.33,3432.74 5240.33,3408.67 5251,3398 v1(5251,3400) ; U16.40@5270.7,3037.5 5270.7,3062.7 v1(5278,3070) 5290.39,3057.61 U16.39@5290.39,3037.5 ; C48.1@5272,1316 5272,1352 v1(5285,1365) ; U13.40@5279.7,3714.24 5279.7,3740.7 v1(5287,3748) 5299.38,3735.61 U13.39@5299.38,3714.24 ; C38.1@5321,453 5352,453 5370,435 v1(5370,410) ; v1(5362,3027) 5362.24,3026.76 U16.36@5362.24,3005.02 ; U16.34@5362.24,2965.65 5392.65,2965.65 v1(5393,2966) ; v1(5371,3702) 5371.24,3701.76 U13.36@5371.24,3681.76 ; U13.34@5371.24,3642.39 5404.38,3642.39 v1(5405,3643)
  Top Layer (.GTL) w10: C42.1@98.47,220.51 127.46,191.51 127.46,175.74 v1(129.46,173.74) ; U20A.3@241,3444 U20A.2@204,3444 204,3542 C44A.2@252,3590 v1(252,3643) ; R8A.1@299.29,3420.28 R8A.1@299.29,3429.41 ; R8A.1@302.24,3432.36 R8A.1@299.29,3429.41 ; R8A.1@305.9,3436.02 R8A.1@299.29,3429.41 ; U14.3@348.47,126.02 348.47,168.74 v1(369.46,189.74) ; v1(387.13,790.63) 387.52,790.24 U2K.3@458.97,790.24 ; v1(387.13,1361.49) 387.52,1361.1 U2F.3@458.98,1361.1 ; v1(387.13,1952.05) 387.52,1951.65 U2A.3@458.98,1951.65 ; v1(440.04,3430.12) 439.33,3429.41 R8A.1@299.29,3429.41 ; v1(757.4,2528.31) U7A.3@830.95,2528.31 ; U15.4@768.46,121.02 807.75,121.02 v1(808.46,121.74) ; U20B.2@975,3427 U20B.3@1012,3427 v1(1012,3393) ; C44B.2@1020,3573 v1(1020,3626) ; R8B.1@1086.69,3420.28 R8B.1@1086.69,3429.41 ; R8B.1@1089.65,3432.36 R8B.1@1086.69,3429.41 ; R8B.1@1093.31,3436.02 R8B.1@1086.69,3429.41 ; v1(1227.44,3430.12) 1226.73,3429.41 R8B.1@1086.69,3429.41 ; v1(1272.95,790.63) 1273.35,790.24 U2L.3@1344.8,790.24 ; v1(1272.95,1361.49) 1273.35,1361.1 U2G.3@1344.8,1361.1 ; v1(1272.95,1952.05) 1273.35,1951.65 U2B.3@1344.8,1951.66 ; U20C.3@1799.4,3427 U20C.2@1762.4,3427 1762.4,3528 C44C.2@1807.4,3573 1807.4,3621.6 v1(1806,3623) ; v1(1830.24,2528.31) U7B.3@1903.78,2528.31 ; R8C.1@1874.09,3420.28 R8C.1@1874.09,3429.41 ; R8C.1@1877.05,3432.36 R8C.1@1874.09,3429.41 ; R8C.1@1880.71,3436.02 R8C.1@1874.09,3429.41 ; v1(2014.84,3430.12) 2014.13,3429.41 R8C.1@1874.09,3429.41 ; v1(2158.78,790.63) 2159.17,790.24 U2M.3@2230.63,790.24 ; v1(2158.78,1361.49) 2159.17,1361.1 U2H.3@2230.63,1361.1 ; v1(2158.78,1952.05) 2159.17,1951.65 U2C.3@2230.63,1951.65 ; U20D.3@2586.8,3427 U20D.2@2549.8,3427 2549.8,3528 C44D.2@2594.8,3573 2594.8,3613.8 v1(2595,3614) ; R8D.1@2661.5,3420.28 R8D.1@2661.5,3429.41 ; R8D.1@2664.45,3432.36 R8D.1@2661.5,3429.41 ; R8D.1@2668.11,3436.02 R8D.1@2661.5,3429.41 ; v1(2802.24,3430.12) 2801.54,3429.41 R8D.1@2661.5,3429.41 ; v1(2903.07,2528.31) U7C.3@2976.61,2528.31 ; v1(3044.61,790.63) 3045,790.24 U2N.3@3116.46,790.24 ; v1(3044.61,1361.49) 3045,1361.1 U2I.3@3116.46,1361.1 ; v1(3044.61,1952.05) 3045,1951.65 U2D.3@3116.46,1951.65 ; v1(3331,3665) 3331,3624.2 C44E.2@3382.2,3573 3337.2,3528 U20E.2@3337.2,3427 U20E.3@3374.2,3427 ; R8E.1@3448.9,3420.28 R8E.1@3448.9,3429.41 ; R8E.1@3451.85,3432.36 R8E.1@3448.9,3429.41 ; R8E.1@3455.51,3436.02 R8E.1@3448.9,3429.41 ; v1(3589.64,3430.12) 3588.94,3429.41 R8E.1@3448.9,3429.41 ; C58.2@3893,469 C57.2@4006,469 ; v1(3930.43,790.63) 3930.83,790.24 U2O.3@4002.28,790.24 ; v1(3930.43,1361.49) 3930.83,1361.1 U2J.3@4002.28,1361.1 ; v1(3930.43,1952.05) 3930.83,1951.65 U2E.3@4002.28,1951.66 ; v1(3975.91,2528.31) U7D.3@4049.45,2528.31 ; C57.2@4021,464.37 4061.63,464.37 4083,443 v1(4083,411) ; U20F.3@4161.61,3427 U20F.2@4124.61,3427 4124.61,3524.73 C44F.2@4169.61,3569.73 ; C44F.2@4169.61,3565.39 C44F.2@4169.61,3569.73 ; v1(4171,3626) 4169.61,3624.61 C44F.2@4169.61,3573 C44F.2@4169.61,3569.73 ; R8F.1@4233.89,3427 R8F.1@4236.3,3429.41 ; R8F.1@4236.3,3420.28 R8F.1@4236.3,3429.41 ; R8F.1@4239.25,3432.36 R8F.1@4236.3,3429.41 ; R8F.1@4242.91,3436.02 R8F.1@4236.3,3429.41 ; v1(4377.05,3430.12) 4376.34,3429.41 R8F.1@4236.3,3429.41 ; R50.1@4791,606 v1(4837,606) ; v1(4888,715) R51.1@4888,797 ; v1(4911,939) 4912,938 R49.1@4912,898 ; v1(5064,1100) 5064.4,1099.6 Q7.2@5102.74,1099.6 ; v1(5133,967) 5133,1007 C47.2@5137,1011 ; v1(5321.46,907.84) U18.1@5321.46,983.35 ; v1(5412.72,823.54) 5442.72,823.54 5452.22,814.04 ; v1(5415.46,1283.23) v1@5419,1286.77 ; R32.1@5452.22,764.92 5452.22,814.04 ; C45.1@5459,869 5452.22,862.22 5452.22,814.04 ; U12.3@5519,1360.51 5519,1392.57 5553.43,1427 v1(5570,1427)
  Top Layer (.GTL) w20: J1.PC07@1114.6,59.15 1114.6,170.6 v1(1115,171) ; v1(1126,522) 1126,522.37 C59.NEG@1205,601.37 ; C56.1@4811,1477 4911,1477 P2.1@4913,1475
  Bottom Layer (.GBL) w5: C35.1@5302,2672.26 5302,2630.26 v1(5303,2629.26) ; C33.1@5311,3359 5314,3356 v1(5314,3314)
  Bottom Layer (.GBL) w10: v1(266.46,250.74) 278.46,262.74 C41.2@278.46,310.51 ; v1(273.94,951.06) 273.94,984.54 C1K.NEG@309.37,1019.98 ; v1(273.94,1521.93) 273.94,1555.41 C1F.NEG@309.37,1590.84 ; v1(273.94,2112.48) 273.94,2145.96 C1A.NEG@309.37,2181.39 ; v1(292.4,2718.31) 296.4,2718.31 C8A.POS@357.4,2779.31 ; C11A.2@299.29,3094.76 349.84,3094.76 350.47,3094.13 v1(350.47,3093.5) ; C43.2@368.46,130.51 368.46,188.74 v1(369.46,189.74) ; v1(431.18,3602.36) 431.3,3602.48 C13A.2@431.3,3641.73 ; v1(507.95,3419.29) 517.2,3410.04 U8A.3@570.94,3410.04 ; C14A.1@541.3,3228.35 599.49,3228.35 v1(600.47,3227.36) ; v1(606.1,3685.32) C9A.2@673.31,3685.32 ; v1(621.14,3548.23) 624.8,3548.23 R14A.1@664.88,3508.15 ; v1(731.61,1018.98) 732.61,1019.98 C3K.POS@801.5,1019.98 ; v1(731.61,1589.84) 732.61,1590.84 C3F.POS@801.5,1590.84 ; v1(731.61,2180.39) 732.61,2181.39 C3A.POS@801.5,2181.39 ; v1(757.4,2528.31) 856.4,2528.31 C5A.NEG@857.4,2527.31 ; C11B.2@1086.69,3094.76 1137.24,3094.76 1137.87,3094.13 v1(1137.87,3093.5) ; v1(1092,2877) 1092.4,2876.6 U5A.3@1092.4,2769.76 ; v1(1159.76,951.06) 1159.76,984.54 C1L.NEG@1195.2,1019.98 ; v1(1159.76,1521.93) 1159.76,1555.41 C1G.NEG@1195.2,1590.84 ; v1(1159.76,2112.48) 1159.76,2145.96 C1B.NEG@1195.2,2181.39 ; v1(1218.58,3602.36) 1218.7,3602.48 C13B.2@1218.7,3641.73 ; v1(1295.35,3419.29) 1304.61,3410.04 U8B.3@1358.35,3410.04 ; C14B.1@1328.7,3228.35 1386.89,3228.35 v1(1387.87,3227.36) ; v1(1365.24,2718.31) 1369.24,2718.31 C8B.POS@1430.24,2779.31 ; v1(1393.5,3685.32) C9B.2@1460.71,3685.32 ; v1(1408.54,3548.23) 1412.2,3548.23 R14B.1@1452.28,3508.15 ; v1(1617.44,1018.98) 1618.44,1019.98 C3L.POS@1687.32,1019.98 ; v1(1617.44,1589.84) 1618.44,1590.84 C3G.POS@1687.32,1590.84 ; v1(1617.44,2180.39) 1618.44,2181.39 C3B.POS@1687.32,2181.39 ; v1(1830.24,2528.31) 1929.24,2528.31 C5B.NEG@1930.24,2527.31 ; C11C.2@1874.09,3094.76 1924.64,3094.76 1925.28,3094.13 v1(1925.28,3093.5) ; v1(2005.98,3602.36) 2006.1,3602.48 C13C.2@2006.1,3641.73 ; v1(2045.59,951.06) 2045.59,984.54 C1M.NEG@2081.02,1019.98 ; v1(2045.59,1521.93) 2045.59,1555.41 C1H.NEG@2081.02,1590.84 ; v1(2045.59,2112.48) 2045.59,2145.96 C1C.NEG@2081.02,2181.39 ; v1(2082.76,3419.29) 2092.01,3410.04 U8C.3@2145.75,3410.04 ; C14C.1@2116.1,3228.35 2174.29,3228.35 v1(2175.28,3227.36) ; v1(2165,2870) 2165.24,2869.76 U5B.3@2165.24,2769.76 ; v1(2180.91,3685.32) C9C.2@2248.11,3685.32 ; v1(2195.94,3548.23) 2199.6,3548.23 R14C.1@2239.68,3508.15 ; v1(2438.07,2718.31) 2442.07,2718.31 C8C.POS@2503.07,2779.31 ; v1(2503.27,1018.98) 2504.27,1019.98 C3M.POS@2573.15,1019.98 ; v1(2503.27,1589.84) 2504.27,1590.84 C3H.POS@2573.15,1590.84 ; v1(2503.27,2180.39) 2504.27,2181.39 C3C.POS@2573.15,2181.39 ; C11D.2@2661.5,3094.76 2712.04,3094.76 2712.68,3094.13 v1(2712.68,3093.5) ; v1(2793.39,3602.36) 2793.5,3602.48 C13D.2@2793.5,3641.73 ; v1(2870.16,3419.29) 2879.41,3410.04 U8D.3@2933.15,3410.04 ; v1(2903.07,2528.31) 3002.07,2528.31 C5C.NEG@3003.07,2527.31 ; C14D.1@2903.5,3228.35 2961.69,3228.35 v1(2962.68,3227.36) ; v1(2931.42,951.06) 2931.42,984.54 C1N.NEG@2966.85,1019.98 ; v1(2931.42,1521.93) 2931.42,1555.41 C1I.NEG@2966.85,1590.84 ; v1(2931.42,2112.48) 2931.42,2145.96 C1D.NEG@2966.85,2181.39 ; v1(2968.31,3685.32) C9D.2@3035.51,3685.32 ; v1(2983.35,3548.23) 2987.01,3548.23 R14D.1@3027.08,3508.15 ; v1(3238,2871) 3238.07,2870.93 U5C.3@3238.07,2769.76 ; v1(3389.09,1018.98) 3390.09,1019.98 C3N.POS@3458.98,1019.98 ; v1(3389.09,1589.84) 3390.09,1590.84 C3I.POS@3458.98,1590.84 ; v1(3389.09,2180.39) 3390.09,2181.39 C3D.POS@3458.98,2181.39 ; C11E.2@3448.9,3094.76 3499.44,3094.76 3500.08,3094.13 v1(3500.08,3093.5) ; v1(3510.91,2718.31) 3514.91,2718.31 C8D.POS@3575.91,2779.31 ; v1(3580.79,3602.36) 3580.9,3602.48 C13E.2@3580.91,3641.73 ; v1(3657.56,3419.29) 3666.81,3410.04 U8E.3@3720.55,3410.04 ; C14E.1@3690.91,3228.35 3749.09,3228.35 v1(3750.08,3227.36) ; v1(3755.71,3685.32) C9E.2@3822.91,3685.32 ; v1(3770.75,3548.23) 3774.41,3548.23 R14E.1@3814.48,3508.15 ; v1(3817.24,951.06) 3817.24,984.54 C1O.NEG@3852.68,1019.98 ; v1(3817.24,1521.93) 3817.24,1555.41 C1J.NEG@3852.68,1590.84 ; v1(3817.24,2112.48) 3817.24,2145.96 C1E.NEG@3852.68,2181.39 ; v1(3975.91,2528.31) 4074.91,2528.31 C5D.NEG@4075.91,2527.31 ; C11F.2@4236.3,3094.76 4286.85,3094.76 4287.48,3094.13 v1(4287.48,3093.5) ; v1(4274.92,1018.98) 4275.92,1019.98 C3O.POS@4344.8,1019.98 ; v1(4274.92,1589.84) 4275.92,1590.84 C3J.POS@4344.8,1590.84 ; v1(4274.92,2180.39) 4275.92,2181.39 C3E.POS@4344.8,2181.39 ; v1(4310,2927) 4310.91,2926.09 U5D.3@4310.91,2769.76 ; v1(4368.19,3602.36) 4368.31,3602.48 C13F.2@4368.31,3641.73 ; v1(4444.96,3419.29) 4454.21,3410.04 U8F.3@4507.95,3410.04 ; C14F.1@4478.31,3228.35 4536.5,3228.35 v1(4537.48,3227.36) ; v1(4543.11,3685.32) C9F.2@4610.31,3685.32 ; v1(4558.15,3548.23) 4561.81,3548.23 R14F.1@4601.89,3508.15 ; R52.1@4898,1082.1 4966.9,1082.1 v1(4976,1073) ; v1(5286.46,1167.84) C40.2@5351.46,1167.84 ; R29.1@5296.19,769.92 5309.61,769.92 5341.4,801.72 5390.89,801.72 ; v1(5321.46,907.84) 5351.46,937.84 R41.1@5351.46,1017.84 ; 5364,802.72 C46.1@5364,853 ; v1(5380.46,1548.23) 5382.23,1550 C25.2@5449,1550 ; v1(5412.72,823.54) 5390.89,801.72 ; v1(5415.46,1283.23) 5444,1311.77 C27.2@5444,1360 ; R27.1@5567.22,679.92 5564.49,679.92 5534.11,649.54 5447.72,649.54 5390.89,706.37 5390.89,801.72 ; v1(5570,1427) 5586,1427 R25.1@5614,1455 ; R35.2@5632.21,529.92 C22.2@5697.21,529.92 ; R44.2@5696.46,1022.83 v1(5741.46,1022.84) ; C22.2@5697.72,529.42 C22.2@5697.21,529.92 ; v1(5727.72,481.54) 5697.21,512.05 C22.2@5697.21,529.92
  Bottom Layer (.GBL) w20: C53.1@3880,325 3995,325 C54.1@4000,330 4051,330 v1(4065,344)
BIAS_V_ON: Q7.1 U9.26 | length 995.2
  Top Layer (.GTL) w5: U9.26@4818.19,1744.37 4818.19,1660.81 v1(4830,1649) ; Q7.1@5102.74,1174.4 5142.6,1174.4 v1(5143,1174)
  MidLayer2 (*.G2) w5: v1(4830,1127) 4877,1174 v1(5143,1174)
  MidLayer3 (*.G3) w5: v1(4830,1127) v1(4830,1649)
CDO1: J1.149 R2F.2 TP3F.1 | length 3270.6
  Top Layer (.GTL) w10: v1(145,1245) 145,1461.04 226.89,1542.93 269.35,1542.93 TP3F.1@309.37,1582.95 ; J1.149@1481,68.09 1481,127 v1(1482,128)
  MidLayer2 (*.G2) w10: v1(145,1245) v1@435,1245 ; v1(153,582) v1(810,582) ; v1@435,1238.87 v1(435,1240.87) ; v1(850,301) 863,314 1426,314 1438,302 v1(1482,302)
  MidLayer3 (*.G3) w10: v1(145,1245) 145,590 v1(153,582) ; v1(810,582) 810,341 v1(850,301) ; v1(1482,128) v1(1482,302)
  Bottom Layer (.GBL) w10: v1@437.32,1243.19 R2F.2@437.32,1291.89 ; v1@1481,301 v1(1482,302)
CDO2: J1.139 R2G.2 TP3G.1 | length 2524.3
  Top Layer (.GTL) w10: v1(1030,1250) 1030,1460.21 1112.71,1542.93 1155.17,1542.93 TP3G.1@1195.2,1582.95 ; J1.139@1606,68.09 v1(1606,129)
  MidLayer2 (*.G2) w10: v1(1030,425) v1(1605,425) ; v1(1030,1250) v1@1320,1250 ; v1@1320.83,1238.87 v1(1320.83,1240.87)
  MidLayer3 (*.G3) w10: v1(1030,425) v1(1030,1250) ; v1(1605,425) 1605,408 1606,407 v1(1606,129)
  Bottom Layer (.GBL) w10: v1@1323.15,1243.19 R2G.2@1323.15,1291.89
CDO3: J1.129 R2H.2 TP3H.1 | length 2130.9
  Top Layer (.GTL) w10: J1.129@1731,68.09 v1@1731,129 ; v1(1925,1245) 1925,1469.39 1998.54,1542.93 2041,1542.93 TP3H.1@2081.02,1582.95
  MidLayer2 (*.G2) w10: v1(1731,481) 1732,482 v1(1924,482) ; v1(1925,1245) v1@2210,1245 ; v1@2206.65,1238.87 v1(2206.65,1240.87)
  MidLayer3 (*.G3) w10: v1(1730,130) v1@1730,480 ; v1(1924,482) 1925,483 v1(1925,1245)
  Bottom Layer (.GBL) w10: v1@2208.98,1243.19 R2H.2@2208.98,1291.89
CDO4: J1.119 R2I.2 TP3I.1 | length 2887.4
  Top Layer (.GTL) w10: v1(1855,130) 1856,129 J1.119@1856,68.09 ; v1(2825,1245) 2825,1483.56 2884.37,1542.93 2926.83,1542.93 TP3I.1@2966.85,1582.95
  MidLayer2 (*.G2) w10: v1(1857,359) v1(2824,359) ; v1(2825,1245) v1@3095,1245 ; v1@3092.48,1238.87 v1(3092.48,1240.87)
  MidLayer3 (*.G3) w10: v1(1855,130) 1855,357 v1(1857,359) ; v1(2824,359) v1(2825,1245)
  Bottom Layer (.GBL) w10: v1@3094.8,1243.19 R2I.2@3094.8,1291.89
CDO5: J1.112 R2J.2 TP3J.1 | length 3690.2
  Top Layer (.GTL) w10: v1(3665,1245) 3665,1437.73 3770.19,1542.93 3812.65,1542.93 TP3J.1@3852.68,1582.95
  MidLayer2 (*.G2) w10: v1(1956,251) v1(3663,251) ; v1(3665,1245) v1@3980,1245 ; v1@3978.31,1238.87 v1(3978.31,1240.87)
  MidLayer3 (*.G3) w10: v1(1956,172) v1(1956,251) ; v1(3663,251) v1(3665,1245)
  Bottom Layer (.GBL) w10: J1.112@1956,68.09 v1(1956,172) ; v1@3980.63,1243.19 R2J.2@3980.63,1291.89
CDO6: J1.148 R2K.2 TP3K.1 | length 2080
  Top Layer (.GTL) w5: v1(302,945) 309.37,952.37 TP3K.1@309.37,1012.09
  MidLayer2 (*.G2) w5: v1(302,945) 435,812 v1(435,670)
  MidLayer2 (*.G2) w10: v1(435,670) 435,668 493,610 860,610 v1(870,600) ; v1(870,335) v1(1505,335)
  MidLayer3 (*.G3) w10: v1(870,335) v1(870,600) ; 1505,322 v1(1505,335) ; v1(1506,165) 1506,321
  Bottom Layer (.GBL) w10: v1@437.32,672.32 R2K.2@437.32,721.02 ; J1.148@1506,68.09 v1(1506,165)
CDO7: J1.138 R2L.2 TP3L.1 | length 1370.5
  Top Layer (.GTL) w10: v1(1188,942) 1188,1004.89 TP3L.1@1195.2,1012.09
  MidLayer2 (*.G2) w10: v1(1188,942) 1187,941 1187,918.44 1179.12,910.56 1179.12,811.71 v1(1320.83,670) v1@1320.83,668 ; v1(1320,457) v1(1630,457)
  MidLayer3 (*.G3) w10: v1(1320,457) v1@1320,670 ; v1(1630,170) v1(1630,457)
  Bottom Layer (.GBL) w10: v1@1323.15,672.32 R2L.2@1323.15,721.02 ; v1(1630,170) 1631,169 J1.138@1631,68.09
CDO8: J1.128 R2M.2 TP3M.1 | length 1507.5
  Top Layer (.GTL) w10: v1(2074,948) 2081.02,955.02 TP3M.1@2081.02,1012.09
  MidLayer2 (*.G2) w10: v1(1756,448) 1758,450 v1(2210,450) ; v1(2074,948) 2081,948 2206.65,822.35 v1(2206.65,670) v1@2206.65,668
  MidLayer3 (*.G3) w10: v1(1755,170) v1@1755,447 ; v1(2210,450) v1@2210,670
  Bottom Layer (.GBL) w10: J1.128@1756,68.09 v1@1756,169 ; v1@2208.98,672.32 R2M.2@2208.98,721.02
CDO9: J1.118 R2N.2 TP3N.1 | length 2264
  Top Layer (.GTL) w10: v1(2962,943) 2962,1007.24 TP3N.1@2966.85,1012.09
  MidLayer2 (*.G2) w10: v1@1882,328 v1(3095,328) ; v1(2962,943) 3092.48,812.52 v1(3092.48,670) v1@3092.48,668
  MidLayer3 (*.G3) w10: v1(1880,175) 1880,325 v1(1882,327) ; v1(3095,328) v1@3095,670
  Bottom Layer (.GBL) w10: v1(1880,175) 1881,174 J1.118@1881,68.09 ; v1@3094.8,672.32 R2N.2@3094.8,721.02
CDO10: J1.113 R2E.2 TP3E.1 | length 4333.2
  Top Layer (.GTL) w10: v1(1930,130) 1931,129 J1.113@1931,68.09 ; v1(3595,1835) 3595,1958.29 3770.19,2133.48 3812.65,2133.48 TP3E.1@3852.68,2173.5
  MidLayer2 (*.G2) w10: v1@1930,291 v1(3590,291) ; v1(3595,1835) v1@3980,1835 ; v1@3978.31,1829.42 v1(3978.31,1831.42)
  MidLayer3 (*.G3) w10: v1(1930,130) v1(1930,289) ; v1(3590,291) 3590,1830 v1(3595,1835)
  Bottom Layer (.GBL) w10: v1@3980.63,1833.74 R2E.2@3980.63,1882.44
CDO11: J1.109 R2O.2 TP3O.1 | length 3053.6
  Top Layer (.GTL) w10: J1.109@1981,68.09 v1@1981,129 ; v1(3846,946) 3852.68,952.68 TP3O.1@3852.68,1012.09
  MidLayer2 (*.G2) w10: v1@1984,213 v1(1980,209) v1@3725,209 ; v1(3735,670) v1(3978.31,670) ; v1(3846,946) 3978.31,813.69 v1(3978.31,670) ; v1@3978.31,668 v1(3978.31,670) ; v1@3985,670 v1(3978.31,670)
  MidLayer3 (*.G3) w10: v1(1980,130) v1(1980,209) v1@1984,213 ; v1(3735,213) v1(3735,670)
  Bottom Layer (.GBL) w10: v1@3980.63,672.32 R2O.2@3980.63,721.02
CDO12: J1.152 R2A.2 TP3A.1 | length 3986.6
  Top Layer (.GTL) w10: v1(304,2111) 304,2168.13 TP3A.1@309.37,2173.5
  MidLayer2 (*.G2) w10: v1(90,521) 102,509 760,509 v1(771,520) ; v1(90,1835) v1@435,1835 ; v1(304,2111) 435,1980 v1@435,1835 ; v1@435,1829.42 v1(435,1831.42) v1@435,1835 ; v1(771,235) 794.5,258.5 1445.5,258.5 v1(1457,270)
  MidLayer3 (*.G3) w10: v1(90,521) v1(90,1835) ; v1(771,235) v1(771,520) ; v1(1456,163) 1456,269 v1(1457,270)
  Bottom Layer (.GBL) w10: v1@437.32,1833.74 R2A.2@437.32,1882.44 ; J1.152@1456,68.09 v1(1456,163)
CDO13: J1.142 R2B.2 TP3B.1 | length 3179.3
  Top Layer (.GTL) w10: v1(1189,2112) 1195.2,2118.2 TP3B.1@1195.2,2173.5
  MidLayer2 (*.G2) w10: v1(965,1830) v1@1320,1830 ; v1(968,394) v1(1580,394) ; v1(1189,2112) 1320.83,1980.17 v1(1320.83,1831.42) v1@1320.83,1829.42
  MidLayer3 (*.G3) w10: v1(965,1830) v1(968,394) ; v1(1580,169) v1(1580,394)
  Bottom Layer (.GBL) w10: v1@1323.15,1833.74 R2B.2@1323.15,1882.44 ; v1(1580,169) 1581,168 J1.142@1581,68.09
CDO14: J1.132 R2C.2 TP3C.1 | length 2718.6
  Top Layer (.GTL) w10: v1(2073.59,2105.28) 2073.59,2166.07 TP3C.1@2081.02,2173.5
  MidLayer2 (*.G2) w10: v1@1708,514 v1(1706,512) 1852,512 v1(1854,514) ; v1(1855,1835) v1@2205,1835 ; v1(2073.59,2105.28) 2074.72,2105.28 2206.65,1973.35 v1(2206.65,1831.42) v1@2206.65,1829.42
  MidLayer3 (*.G3) w10: v1(1706,171) v1(1706,512) ; v1(1854,514) 1855,515 v1(1855,1835)
  Bottom Layer (.GBL) w10: J1.132@1706,68.09 v1(1706,171) ; v1@2208.98,1833.74 R2C.2@2208.98,1882.44
CDO15: J1.122 R2D.2 TP3D.1 | length 3536.1
  Top Layer (.GTL) w10: v1(2750,1840) 2750,1999.11 2884.37,2133.48 2926.83,2133.48 TP3D.1@2966.85,2173.5
  MidLayer2 (*.G2) w10: v1(1830,391) v1@1832,393 ; v1@1832,392 v1(2750,392) ; v1(2750,1840) v1@3095,1840 ; v1@3092.48,1829.42 v1(3092.48,1831.42)
  MidLayer3 (*.G3) w10: v1(1830,174) v1(1830,391) ; v1(2750,392) v1(2750,1840)
  Bottom Layer (.GBL) w10: v1(1830,174) 1831,173 J1.122@1831,68.09 ; v1@3094.8,1833.74 R2D.2@3094.8,1882.44
CDO16: J1.153 R4A.2 TP4A.1 | length 4571.4
  Top Layer (.GTL) w10: R4A.2@312.4,2483.31 312.4,2457.4 v1(290,2435) 253.4,2471.6 253.4,2756.4 280.31,2783.31 TP4A.1@367.4,2783.31 ; J1.153@1431,68.09 1431,125 v1(1432,126)
  MidLayer2 (*.G2) w10: v1(35,477) v1(738,477) ; v1(35,2435) v1(290,2435) ; v1(740,203) 743,206 804,206 825,227 v1(1432,227)
  MidLayer3 (*.G3) w10: v1(35,477) v1(35,2435) ; v1(738,477) 740,475 v1(740,203) ; v1(1432,126) v1(1432,227)